# Altium PCB PCB1.PcbDoc
Units mm, origin at the board's own origin, x right, y up, seen from the top; angles counter-clockwise.
Board outline 152.4 x 101.6 mm, 2 copper layers (Top Layer, Bottom Layer); 37 components, 42 nets, 162 pads, 4 vias.
Unrouted connection lines stored in the file: 1.
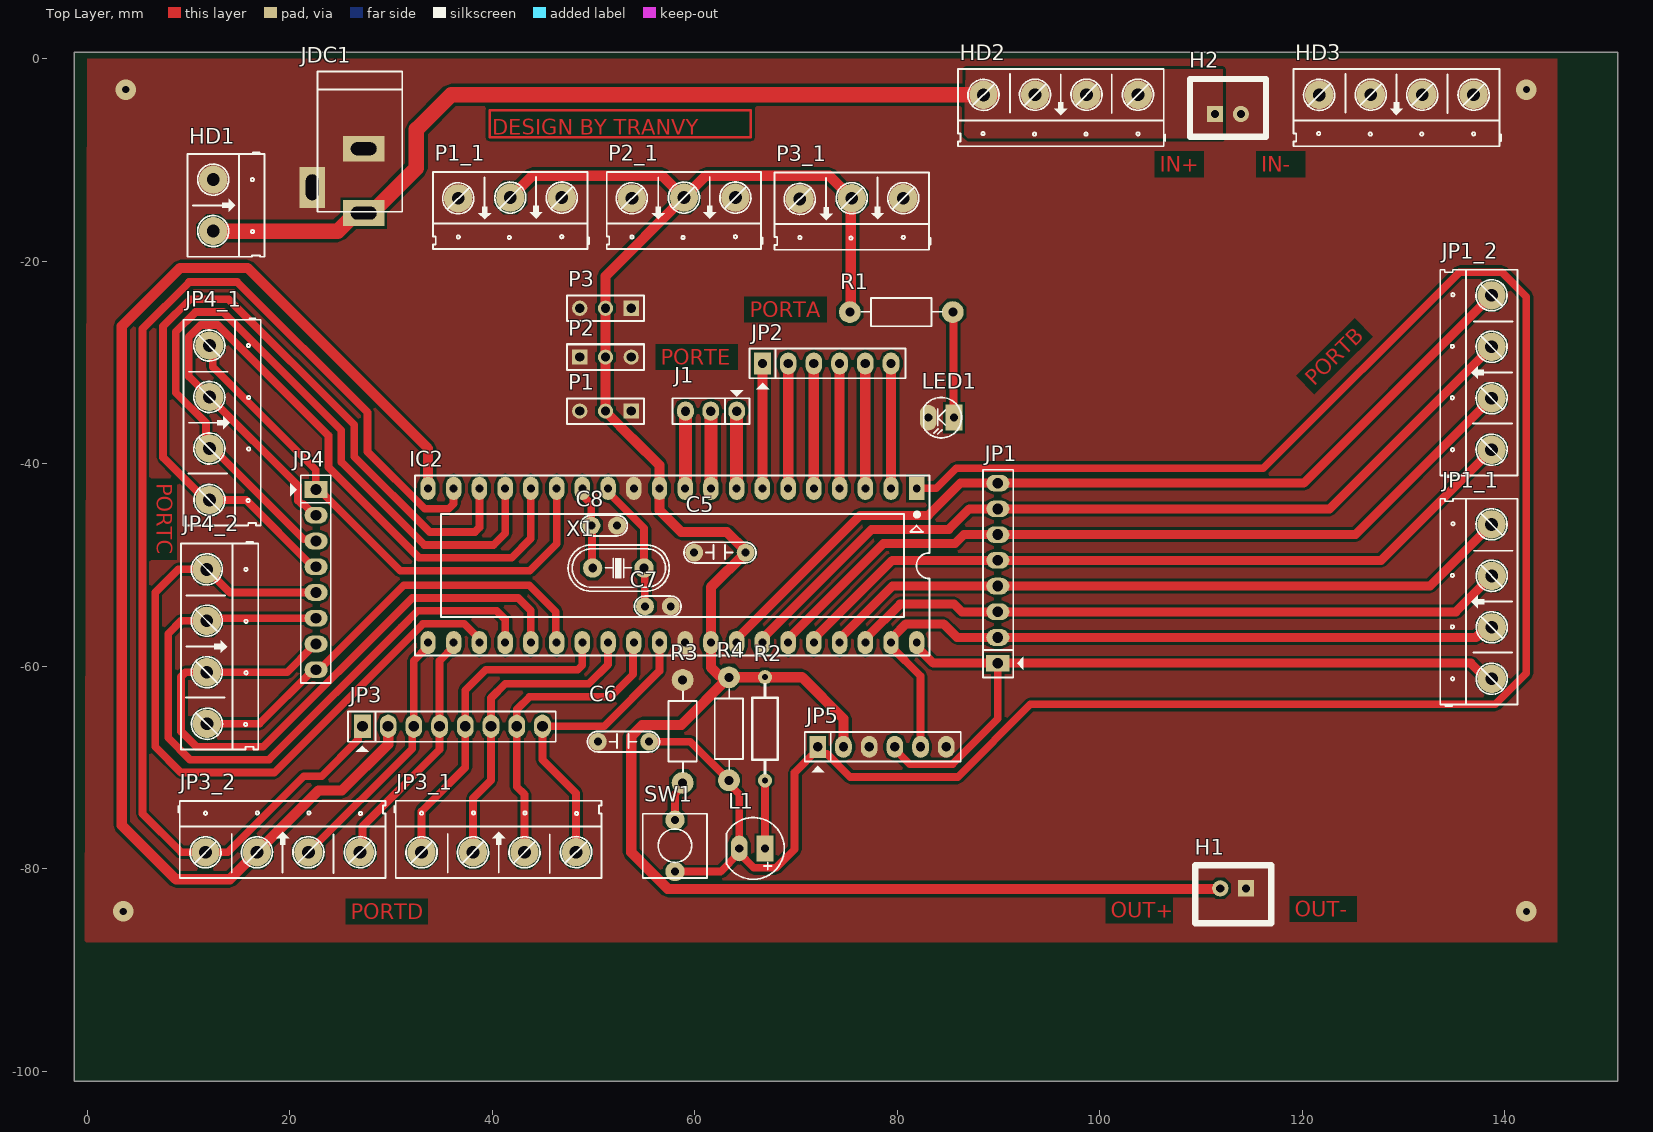
[diagram p0: Top Layer view]
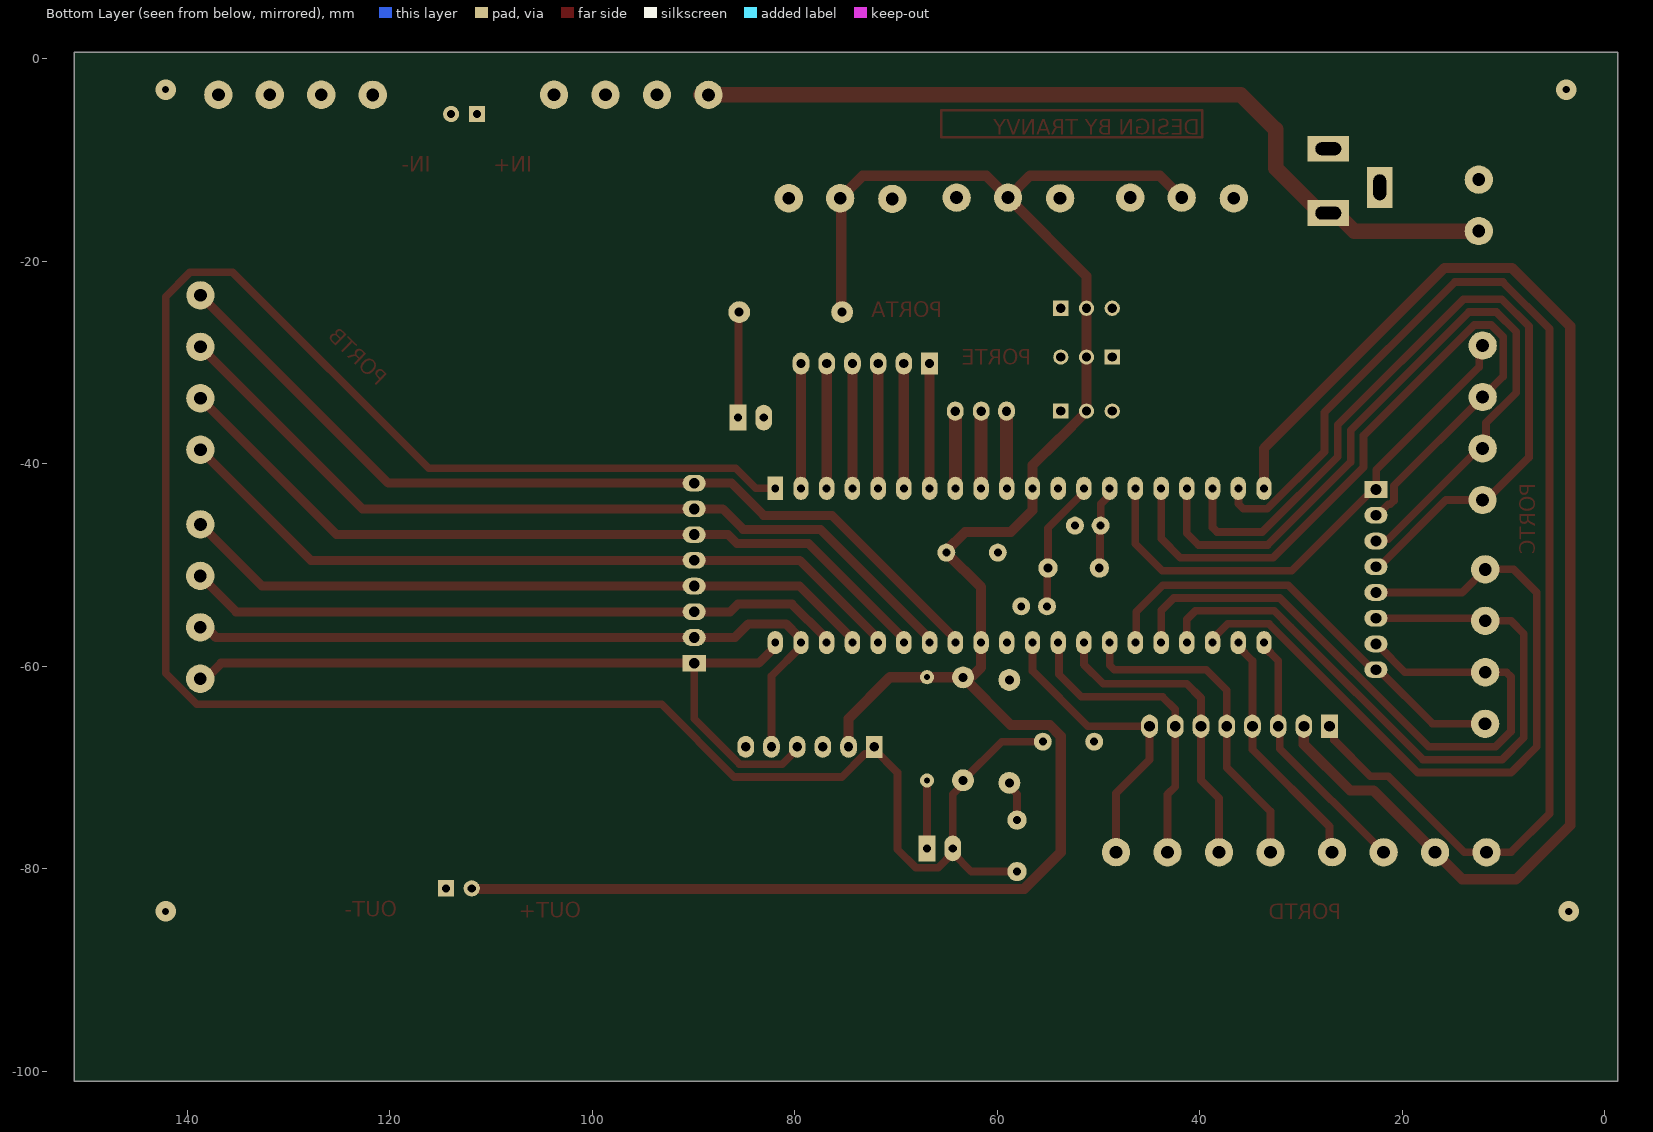
[diagram p1: Bottom Layer view, seen from below]
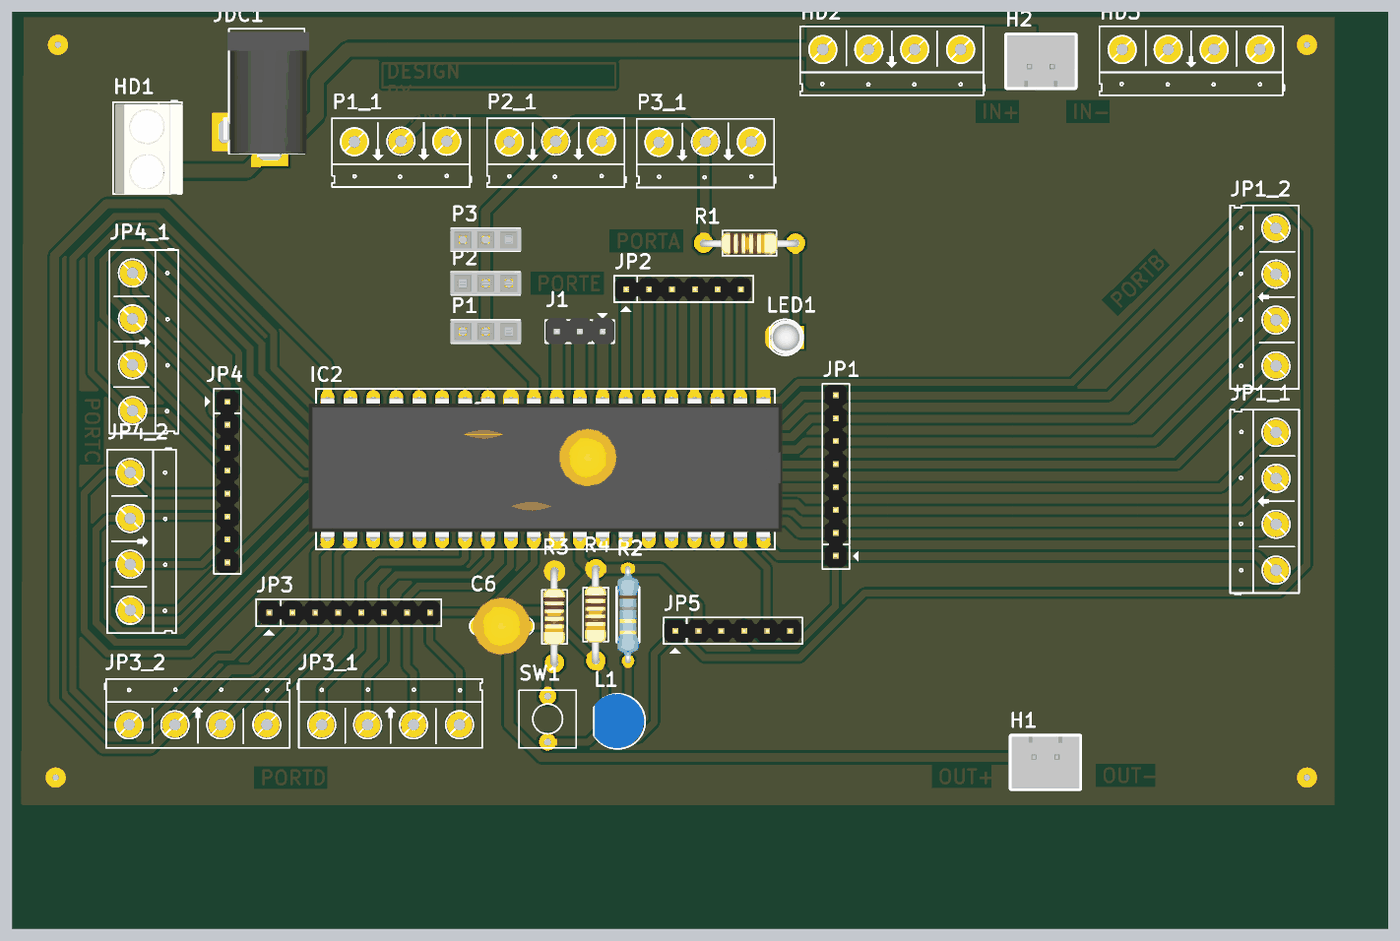
[diagram p2: 3D render of the assembled board from above, using the file's embedded part models]

## Layer stack, top to bottom
Top Solder: solder mask 0.0102, Solder Resist, Dk 3.5
Top Layer: signal copper 0.0356
Dielectric 1: dielectric 0.32, FR-4, Dk 4.8
Bottom Layer: signal copper 0.0356
Bottom Solder: solder mask 0.0102, Solder Resist, Dk 3.5

## Board outline
-1.27,-100.965 151.13,-100.965 151.13,0.635 -1.27,0.635

## Design rules (kind name [scope] priority, off if disabled: settings)
Clearance [All] p1: gap=0.254 ignorepadtopadclearanceinfootprint=FALSE except(0.508: Arc-Arc Arc-Track Track-Track)
PlaneConnect [All] p1: planeconnectstyle=Relief reliefexpansion=1.27 reliefentries=4 reliefconductorwidth=1.27 reliefairgap=0.254
PolygonConnect [All] p1: connectstyle=Direct reliefconductorwidth=0.254 reliefentries=4 polygonreliefangle="90 Angle" airgapwidth=0.254
RoutingVias [All] p1: holewidth=0.711 width=1.27 viastyle="Through Hole" minholewidth=0.711 minwidth=1.27 maxholewidth=0.711 maxwidth=1.27
SolderMaskExpansion [All] p1: expansion=0.102 istentingtop=FALSE
SupplyNets "Schematic Supply Nets_2" [InNet('+12')] p1: voltage=0.000
SupplyNets "Schematic Supply Nets_1" [InNet('+5')] p2: voltage=0.000
SupplyNets "Schematic Supply Nets" [InNet('GND')] p3: voltage=0.000
Width [All] p1: maxlimit=2.54 minlimit=0.254 preferedwidth=0.508
29 further rules are at their usual default settings.

## Components (designator, comment, footprint, x,y, rotation, side; value= is the part's Value field where it differs from the comment)
C5 "104" CN2 59.944,-48.768 r0 top value=0.1uF
C6 "104" CN2 50.419,-67.437 r0 top value=0.1uF
C7 "100pF" CN1 57.626,-54.07 r180 top
C8 "100pF" CN1 52.324,-46.101 r180 top
H1 "OUT" XH2.54M-2 114.427,-81.915 r180 top
H2 "IN" XH2.54M-2 111.379,-5.461 r0 top
HD1 "Header 2" HED2 12.446,-11.938 r270 top
HD2 "Header 4" HED4 103.759,-3.556 r180 top
HD3 "Header 4" HED4 136.908,-3.554 r180 top
IC2 "16F877A" DIP40/W0.6 81.915,-42.418 r180 top value=PIC16F877A
J1 "Jumper 3" JP3 61.595,-34.798 r180 top value=J3
JDC1 "Jac DC" DC-IN 24.765,-12.065 r270 top
JP1 "JP8 PIN" JP8 89.916,-59.69 r90 top value=JP7
JP1_1 "Header 4" HED4 138.694,-61.224 r90 top
JP1_2 "Header 4" HED4 138.684,-38.608 r90 top
JP2 "JP6 PIN" JP6 66.675,-30.099 r0 top value=JP7
JP3 "JP8 PIN" JP8 27.178,-65.913 r0 top value=JP7
JP3_1 "Header 4" HED4 33.02,-78.359 r0 top
JP3_2 "Header 4" HED4 11.682,-78.361 r0 top
JP4 "JP8 PIN" JP8 22.606,-42.545 r270 top value=JP7
JP4_1 "Header 4" HED4 12.063,-28.319 r270 top
JP4_2 "Header 4" HED4 11.811,-50.419 r270 top
JP5 "JP6 PIN" JP6 72.136,-67.945 r0 top value=JP7
L1 "LED 5mm" LED-5MM-BLUE 65.786,-77.978 r180 top
LED1 "LED" LED-3 85.598,-35.433 r180 top value="LED 3 ly Single Colour"
P1 "Header 3" HDR1X3 53.721,-34.798 r180 top
P1_1 "Header 3" HED3 46.863,-13.716 r180 top
P2 "Header 3" HDR1X3 48.641,-29.464 r0 top
P2_1 "Header 3" HED3 64.008,-13.716 r180 top
P3 "Header 3" HDR1X3 53.721,-24.638 r180 top
P3_1 "Header 3" HED3 80.585,-13.776 r180 top
R1 "1k" R1/2W 85.471,-25.019 r180 top value="R1/4W - 1K"
R2 "330R" "tro vach 1/4w" 66.929,-66.167 r90 top
R3 "100R" R1/2W 58.801,-71.501 r90 top value="R1/4W - 1K"
R4 "10k" R1/2W 63.373,-71.247 r90 top value="R1/4W - 1K"
SW1 "SW" SW2 58.039,-75.184 r270 top value="SW chip 2 pin"
X1 "4Mhz" XT2 52.451,-50.292 r180 top

## Footprints (in the part's own frame and the unit in brackets; to place one, negate y for a bottom-side part, rotate by r counter-clockwise, add the part's x,y. Pads: shape width x height; smd on the part's side, far side on the other; paste and mask are expansions set on the pad)
CN1 [mil]
  round 70 hole 31: 1(0,0) 2(100,0)
  silkscreen extent -40,-40 141,40, body extent -60,-30 170,37, height 265
CN2 [mil]
  round 70 hole 31: 1(0,0) 2(200,0)
  silkscreen extent -40,-40 240,40, body extent -26,-125 226,126, height 423
DC-IN [mil] "Jac DC input"
  rect 100x160 hole 50 slot 100 at 90 deg: 1(125,100) 2(-125,100)
  rect 160x100 hole 50 slot 100 at 0 deg: 3(25,-100)
  silkscreen extent -425,-80 120,250, body extent -410,-105 134,269, height 434
DIP40/W0.6 [mil] "40 PIN, W 600mil, Pin to pin 100mil"
  rect 60x90 hole 31: 1(0,0)
  oval 60x90 hole 31: 2(100,0) 3(200,0) 4(300,0) 5(400,0) 6(500,0) 7(600,0) 8(700,0) 9(800,0) 10(900,0) 11(1000,0) 12(1100,0) 13(1200,0) 14(1300,0) 15(1400,0) 16(1500,0) 17(1600,0) 18(1700,0) 19(1800,0) 20(1900,0) 21(1900,600) 22(1800,600) 23(1700,600) 24(1600,600) 25(1500,600) 26(1400,600) 27(1300,600) 28(1200,600) 29(1100,600) 30(1000,600) 31(900,600) 32(800,600) 33(700,600) 34(600,600) 35(500,600) 36(400,600) 37(300,600) 38(200,600) 39(100,600) 40(0,600)
  silkscreen extent -50,-50 1950,650, body extent -82,-10 1982,600, height 224
HDR1X3 [mm] "Connector; Header; 3 Position"
  rect 1.5x1.5 hole 0.9: 1(0,0)
  round 1.5 hole 0.9: 2(2.54,0) 3(5.08,0)
  silkscreen extent -1.27,-1.27 6.35,1.27, body extent -1.39,-1.25 6.48,1.25, height 5.12
HED2 [mil] "Header 2, 2 pin, hight 300mil, Pin to Pin 200, Colour Green"
  round 110 hole 50: 1(0,0) 2(200,0)
  silkscreen extent -106,-100 300,200, body extent -92,-90 302,205, height 394
HED3 [mil] "Header 3, 3 pin, hight 300mil, Pin to Pin 200, Colour Green"
  round 110 hole 50: 1(0,0) 2(200,0) 3(402.62,2.62)
  silkscreen extent -106,-100 500,200
HED4 [mil] "Header 4, 4 pin, hight 300mil, Pin to Pin 200, Colour Green"
  round 110 hole 50: 1(0,0) 2(200,0) 3(400.06,0.06) 4(600.39,0.39)
  silkscreen extent -106,-100 700,200
JP3 [mil] "Jumper 3"
  oval 65x75 hole 36: 1(-100,0) 2(1,0) 3(99,0)
  silkscreen extent -150,-81 150,50, body extent -150,-60 150,55, height 355
JP6 [mil] "JP6"
  rect 65x85 hole 36: 1(0,0)
  oval 65x85 hole 36: 2(100,0) 3(200,0) 4(300,0) 5(400,0) 6(500,0)
  silkscreen extent -50,-99 556,58, body extent -48,-50 548,48, height 323
JP8 [mil] "JP8"
  rect 65x90 hole 42: 1(0,0)
  oval 65x90 hole 42: 2(100,0) 3(200,0) 4(300,0) 5(400,0) 6(500,0) 7(600,0) 8(700,0)
  silkscreen extent -56,-100 752,57, body extent -48,-50 748,48, height 323
LED-3 [mil] "LED 2 PIN, 3ly Only colour"
  rect 65x100 hole 32: 1(0,0)
  oval 65x100 hole 32: 2(100,0)
  silkscreen extent -29,-78 118,79, body extent -29,-75 109,75, height 256
LED-5MM-BLUE [mil] "LED 2 PIN, 5 ly , Only colour, pin to pin 110mil"
  rect 65x100 hole 32: 1(-45,0)
  oval 65x100 hole 32: 2(55,0)
  silkscreen extent -120,-120 104,120, body extent -113,-120 100,117, height 339
R1/2W [mil] "R 1/2W, 2 pin, 300mil"
  round 85 hole 35: 1(0,0) 2(400,0)
  silkscreen extent 42,-55 356,55, body extent -12,-45 414,49, height 91
SW2 [mil] "SW button 2pin, 250x 250 mil"
  round 75 hole 31: 1(0,0) 2(200,0)
  silkscreen extent -25,-125 225,125
"tro vach 1/4w" [mm]
  round 1.4 hole 0.6: 1(-5.1,0) 2(5.1,0)
  silkscreen extent -4.39,-1.25 4.42,1.25, body extent -5.38,-1.2 5.38,1.2, height 2.41
XH2.54M-2 [mm]
  rect 1.6x1.6 hole 0.8: 1(0,0)
  round 1.6 hole 0.8: 2(2.54,0)
  silkscreen extent -2.48,-2.26 5.02,3.46, body extent -2.48,-2.26 5.02,3.48, height 6.91
XT2 [mil] "Footpin for Crystal 2 pin"
  round 75 hole 34: 1(-100,0) 2(100,0)
  silkscreen extent -198,-90 195,90, body extent -233,-93 213,90, height 138

## Part data
C5 C6: library part CN2, "Cap np 104 => 105pF"
C7 C8: library part CN1, "Cap np  1pF - 472pF"
H1 H2: library part "Header 2P 2.54 Duc Thang", Chung_Loai=Cắm, Don_Vi=Con, Ma_Hang=MH001283, Ten_Linh_Kien="Header 2P XH2.54-2P Đực Thẳng"
HD1: library part Hed2, "Header 2 (Green)"
HD2 HD3 JP1_1 JP1_2 JP3_1 JP3_2 JP4_1 JP4_2: library part Hed4, "Header 4 (Green)"
IC2: library part 16F877, "8K FLASH, 368B RAM, 256B EFROM", Copyright by=VanDungEvn
J1: library part JP3
JDC1: library part DCIN, "Jac DC input"
JP1 JP3 JP4: library part JP8
JP2 JP5: library part JP6
L1: library part "LED 5mm Xanh Duong", "Cắm", Chung_Loai=Cắm, Don_Vi=Con, Ma_Hang=MH008987, Ten_Linh_Kien="Led 5MM Xanh Dương Đục (1000c)"
LED1: "LED Single colour Green and Red"
P1 P2 P3: "Header, 3-Pin", LatestRevisionDate=17-Jul-2002, LatestRevisionNote="Re-released for DXP Platform.", Publisher="Altium Limited"
P1_1 P2_1 P3_1: library part Hed3, "Header 3 (Green)"
R1 R3 R4: library part R1/4W, "Resistor 1/4W"
R2: library part "Tro Vach 1/4W 5% 330R", "Cắm", Chung_Loai=Cắm, Don_Vi=Con, Ma_Hang=MH007436, So_Chan=2, Ten_Linh_Kien="Trở Vạch 1/4W 5% 330R"
SW1: library part SW2, "Switch button 2 pin"
X1: library part XT2, "Crystal For all Crystal 2pin."

## Via types
v1: diameter 2.032, hole 0.711, Top Layer to Bottom Layer, 4 vias

## Nets (pads, with @x,y where several pads share a name; then routed paths per layer and width w, separated by ;. In a path a pad name is that pad's centre, name@x,y a point inside that pad or via, vN(x,y) a via of type N, cw(c..) or ccw(c..) an arc to the next point about the centre after c; other vN are vias at no path point)
+5: C5.2 H1.2 IC2.11 IC2.32 JP5.2 P1.2 P1_1.2 P2.2 P2_1.2 P3.2 P3_1.2 R1.2 R2.2 R4.2 | length 209.8
  Top Layer w1.016: P1_1.2 43.942,-11.557 56.769,-11.557 P2_1.2 ; R2.2@66.909,-61.087 R4.2 ; R2.2 70.592,-61.067 74.676,-65.151 JP5.2 74.554,-67.823 JP5.2@74.554,-67.381 ; R1.2 75.408,-24.922 75.408,-13.873 P3_1.2 73.285,-11.557 61.087,-11.557 P2_1.2 ; H1.2 111.823,-81.978 57.329,-81.978 53.721,-78.371 53.721,-66.88 54.815,-65.786 58.674,-65.786 R4.2 ; P2_1.2 51.181,-21.463 P3.2 P2.2 P1.2 51.181,-34.836 53.899,-37.553 53.936,-37.553 56.515,-40.132 56.515,-44.577 58.674,-46.736 63.159,-46.736 65.024,-48.601 C5.2 61.595,-52.197 61.595,-60.086 62.377,-60.868 63.154,-60.868 R4.2
+12: H2.1 HD1.2 HD2.1 HD2.2 HD2.3 HD2.4 JDC1.1 | length 84.6
  Top Layer w1.524: HD1.2 24.765,-17.018 26.543,-15.24 JDC1.1 28.067,-15.24 32.512,-10.795 32.512,-6.985 35.931,-3.566 HD2.4@89.271,-3.566
GND: C5.1 C6.1 C7.1 C8.1 H1.1 H2.2 HD1.1 HD3.1 HD3.2 HD3.3 HD3.4 IC2.12 IC2.31 JDC1.2 JDC1.3 JP5.3 JP5.6 LED1.2 P1.1 P1.3 P1_1.1 P1_1.3 P2.1 P2.3 P2_1.1 P2_1.3 P3.1 P3.3 P3_1.1 P3_1.3 R3.2
  other v1: 3.556,-84.201 142.113,-84.201 3.81,-3.048 142.113,-3.048
MCLR: C6.2 IC2.1 JP5.1 L1.2 R4.1 SW1.2 | length 224.9
  Top Layer w0.762: C6.2 59.563,-67.437 R4.1 63.373,-71.625 64.389,-72.641 L1.2 L1.2@64.389,-78.422 ; SW1.2 62.547,-80.264 L1.2@64.389,-78.422 ; IC2.1 83.839,-42.418 85.808,-40.45 116.141,-40.45 135.509,-21.082 139.7,-21.082 142.113,-23.495 142.113,-60.679 139.038,-63.754 93.143,-63.754 85.967,-70.929 75.341,-70.929 73.055,-68.644 72.581,-68.644 JP5.1@72.136,-68.199 ; L1.2@64.389,-78.422 64.389,-78.432 65.84,-79.883 68.018,-79.883 69.855,-78.046 69.855,-70.48 JP5.1@72.136,-68.199 ; JP5.1@72.136,-68.199 JP5.1 JP5.1@72.136,-68.199
NetC7_2: C7.2 IC2.13 X1.1 | length 13.2
  Top Layer w0.762: IC2.13 51.435,-42.799 54.991,-46.355 X1.1 55.054,-50.355 55.054,-54.038 C7.2@55.118,-54.102
NetC8_2: C8.2 IC2.14 X1.2 | length 8.3
  Top Layer w0.762: IC2.14 48.895,-43.074 49.784,-43.963 C8.2 49.847,-46.164 49.847,-50.228 X1.2
NetL1_1: L1.1 R2.1 | length 6.7
  Top Layer w0.762: L1.1 R2.1
NetLED1_1: LED1.1 R1.1 | length 10.5
  Top Layer w0.762: R1.1 85.534,-25.082 85.534,-35.369 LED1.1
NetR3_1: R3.1 SW1.1 | length 4
  Top Layer w0.762: SW1.1 58.039,-72.641 58.801,-71.879 R3.1
PGC/RB6: IC2.39 JP1.2 JP1_1.2 JP5.5 | length 72.8
  Top Layer w0.762: IC2.39 79.375,-58.039 82.296,-60.96 JP5.5
  Top Layer w0.889: IC2.39 79.582,-57.451 79.582,-57.07 80.836,-55.816 84.564,-55.816 85.897,-57.15 JP1.2 137.138,-57.15 138.144,-56.144 JP1_1.2
PGD/RB7: IC2.40 JP1.1 JP1_1.1 JP5.4 | length 76.8
  Top Layer w0.762: JP5.4 79.756,-68.199 81.216,-69.659 85.441,-69.659 89.916,-65.184 JP1.1 JP1.1@89.599,-59.69
  Top Layer w0.889: IC2.40 81.915,-58.039 83.566,-59.69 89.154,-59.69 JP1.1@89.599,-59.69 ; JP1.1 136.636,-59.69 138.17,-61.224 JP1_1.1
RA0: IC2.2 JP2.6 | length 12.3
  Top Layer w1.016: IC2.2 JP2.6
RA1: IC2.3 JP2.5 | length 12.3
  Top Layer w1.016: IC2.3 JP2.5
RA2: IC2.4 JP2.4 | length 12.3
  Top Layer w1.016: IC2.4 JP2.4
RA3: IC2.5 JP2.3 | length 12.3
  Top Layer w1.016: IC2.5 JP2.3
RA4: IC2.6 JP2.2 | length 12.3
  Top Layer w1.016: IC2.6 JP2.2
RA5: IC2.7 JP2.1 | length 12.3
  Top Layer w1.016: IC2.7 JP2.1
RB0: IC2.33 JP1.8 JP1_2.4 | length 89
  Top Layer w0.889: IC2.33 64.135,-57.277 76.327,-45.085 83.058,-45.085 86.233,-41.91 JP1.8 120.122,-41.91 JP1_2.4
RB1: IC2.34 JP1.7 JP1_2.3 | length 84.3
  Top Layer w0.889: IC2.34 66.675,-57.277 77.47,-46.482 85.09,-46.482 87.122,-44.45 JP1.7 122.679,-44.45 JP1_2.3
RB2: IC2.35 JP1.6 JP1_2.2 | length 79.7
  Top Layer w0.889: IC2.35 69.215,-57.277 78.613,-47.879 85.669,-47.879 86.558,-46.99 125.222,-46.99 JP1_2.2
RB3: IC2.36 JP1.5 JP1_2.1 | length 75
  Top Layer w0.889: IC2.36 71.755,-57.277 79.502,-49.53 JP1.5 127.762,-49.53 JP1_2.1
RB4: IC2.37 JP1.4 JP1_1.4 | length 69.5
  Top Layer w0.889: IC2.37 74.295,-57.277 79.502,-52.07 JP1.4 132.588,-52.07 JP1_1.4
RB5: IC2.38 JP1.3 JP1_1.3 | length 65.4
  Top Layer w0.889: IC2.38 77.042,-57.451 77.042,-57.07 80.264,-53.848 85.598,-53.848 86.36,-54.61 135.145,-54.61 JP1_1.3
RC0: IC2.15 JP4.1 JP4_1.1 | length 52.2
  Top Layer w0.762: JP4_1.1 12.397,-28.653 12.397,-30.431 22.561,-40.595 22.561,-42.5 22.878,-42.5 30.924,-50.546 43.688,-50.546 46.355,-47.879 IC2.15
RC1: IC2.16 JP4.2 JP4_1.2 | length 74.4
  Top Layer w0.762: JP4.2 22.477,-45.085 21.398,-44.005 21.2,-44.005 20.828,-43.634 20.828,-42.164 JP4_1.2 10.031,-31.367 10.031,-27.478 11.222,-26.287 12.905,-26.287 23.831,-37.213 23.831,-40.338 32.768,-49.276 41.91,-49.276 43.815,-47.371 IC2.16
RC2: IC2.17 JP4.3 JP4_1.3 | length 76.8
  Top Layer w0.762: JP4.3 22.436,-47.455 21.374,-47.455 12.401,-38.481 JP4_1.3 11.731,-38.147 11.731,-35.941 8.761,-32.971 8.761,-26.952 10.696,-25.017 13.431,-25.017 25.101,-36.687 25.101,-39.812 33.294,-48.006 40.132,-48.006 41.275,-46.863 IC2.17
RC3: IC2.18 JP4.4 JP4_1.4 | length 80.3
  Top Layer w0.762: JP4.4 22.288,-50.165 15.693,-43.569 11.692,-43.569 7.491,-39.368 7.491,-26.426 10.17,-23.747 13.957,-23.747 26.371,-36.161 26.371,-39.286 33.82,-46.736 38.289,-46.736 38.735,-46.29 IC2.18
RC4: IC2.23 JP4.5 JP4_2.1 | length 73.2
  Top Layer w0.762: JP4.5 14.097,-52.705 JP4_2.1 9.017,-50.419 6.731,-52.705 6.731,-67.945 9.271,-70.485 18.471,-70.485 33.168,-55.788 37.246,-55.788 38.735,-57.277 IC2.23
RC5: IC2.24 JP4.6 JP4_2.2 | length 68.1
  Top Layer w0.762: JP4_2.2 9.271,-55.499 8.001,-56.769 8.001,-67.056 10.16,-69.215 17.945,-69.215 30.988,-56.172 32.642,-54.518 40.421,-54.518 41.275,-55.372 IC2.24 ; JP4_2.2@12.065,-55.245 JP4.6
RC6: IC2.25 JP4.7 JP4_2.3 | length 64.9
  Top Layer w0.762: JP4.7@22.606,-58.039 22.288,-58.039 19.747,-60.581 9.717,-60.581 9.271,-61.027 9.271,-66.421 10.795,-67.945 17.399,-67.945 32.096,-53.248 42.58,-53.248 43.815,-54.483 IC2.25
RC7: IC2.26 JP4.8 JP4_2.4 | length 44.1
  Top Layer w0.762: JP4_2.4 17.008,-65.669 22.352,-60.325 JP4.8 ; JP4.8@22.81,-60.248 23,-60.248 31.27,-51.978 43.646,-51.978 46.278,-54.61 46.278,-57.581 IC2.26
RD0: IC2.19 JP3.1 JP3_2.1 | length 122.8
  Top Layer w0.762: JP3.1@27.178,-65.935 26.733,-66.379 26.733,-67.274 23.156,-70.852 21.398,-70.852 13.889,-78.361 9.273,-78.361 5.461,-74.549 5.461,-26.66 10.066,-22.055 14.816,-22.055 27.686,-34.925 27.686,-38.806 33.33,-44.45 35.687,-44.45 36.181,-43.956 36.181,-42.432 IC2.19
RD1: IC2.20 JP3.2 JP3_2.2 | length 129
  Top Layer w1.016: JP3.2 29.718,-67.691 25.16,-72.249 22.874,-72.249 JP3_2.2 14.097,-81.026 8.763,-81.026 3.429,-75.692 3.429,-26.416 9.187,-20.658 15.832,-20.658 33.655,-38.481 IC2.20
RD2: IC2.21 JP3.3 JP3_2.3 | length 25.6
  Top Layer w0.762: JP3_2.3 32.088,-68.115 32.088,-66.083 JP3.3 32.258,-59.436 33.655,-58.039 IC2.21
RD3: IC2.22 JP3.4 JP3_2.4 | length 24.5
  Top Layer w0.762: JP3_2.4 27.191,-78.092 27.191,-75.811 34.798,-68.203 JP3.4 34.798,-59.436 36.195,-58.039 IC2.22
RD4: IC2.27 JP3.5 JP3_1.1 | length 32.6
  Top Layer w0.762: JP3_1.1 33.02,-74.299 37.338,-69.981 JP3.5 37.338,-62.357 39.37,-60.325 48.449,-60.325 48.895,-59.879 IC2.27
RD5: IC2.28 JP3.6 JP3_1.2 | length 31.1
  Top Layer w0.762: JP3_1.2 38.1,-73.029 39.878,-71.251 JP3.6 39.878,-63.119 41.275,-61.722 49.53,-61.722 51.435,-59.817 IC2.28
RD6: IC2.29 JP3.7 JP3_1.3 | length 30.5
  Top Layer w0.762: JP3_1.3 43.182,-72.646 42.418,-71.882 42.418,-64.262 43.688,-62.992 51.689,-62.992 53.907,-60.774 53.907,-57.726 IC2.29
RD7: IC2.30 JP3.8 JP3_1.4 | length 30.4
  Top Layer w0.762: JP3_1.4 48.27,-72.527 44.958,-69.215 JP3.8 51.054,-65.913 56.515,-60.452 IC2.30
RE0: IC2.8 J1.1 | length 7.6
  Top Layer w1.27: IC2.8 J1.1
RE1: IC2.9 J1.2 | length 7.6
  Top Layer w1.27: J1.2 61.582,-34.811 61.582,-42.405 IC2.9
RE2: IC2.10 J1.3 | length 7.6
  Top Layer w1.27: IC2.10 59.068,-42.405 59.068,-34.811 J1.3
copper on no net: | length 56.9
  Top Layer w0.254: 39.751,-7.747 65.532,-7.747 65.532,-5.08 39.751,-5.08 39.751,-7.747

## Polygon pours and split planes (outlines as drawn)
GND on Top Layer "GND_L01_P004" (solid, pour order 4): 0,0 145.161,0 145.161,-87.249 -0.254,-87.249
+12 on Top Layer "+12_L01_P000" (solid, pour order 0): 86.741,-1.016 112.141,-1.016 112.141,-7.747 112.268,-7.874 86.614,-7.874

## Other copper
Top Layer:
  text "DESIGN BY TRANVY" at 40.005,-7.493 h1.52
  text "IN+" at 105.918,-11.176 h1.52
  text "IN-" at 115.951,-11.176 h1.52
  text "PORTA" at 65.405,-25.527 h1.52
  text "PORTE" at 56.642,-30.226 h1.52
  text "PORTB" at 121.162,-32.407 h1.52 r44.36
  text "PORTC" at 6.858,-41.91 h1.52 r270
  text "OUT-" at 119.253,-84.709 h1.52
  text "OUT+" at 101.092,-84.836 h1.52
  text "PORTD" at 26.035,-84.963 h1.52

## Silkscreen, mask and mechanical layers (free items; w line width, h text height)
Mechanical 1:
  lines w0.254: 0,-87.249 0,0 145.288,0 145.288,-87.249 0,-87.249 ; 93.599,-86.106 133.604,-86.106 133.604,-1.016 93.599,-1.016 93.599,-86.106